# Altium PCB PCB_M2.PcbDoc
Units mil, origin at the board's own origin, x right, y up, seen from the top; angles counter-clockwise.
Board outline 3550 x 2000 mil, 2 copper layers (Top Layer, Bottom Layer); 28 components, 19 nets, 72 pads, 7 vias.
Unrouted connection lines stored in the file: 24.
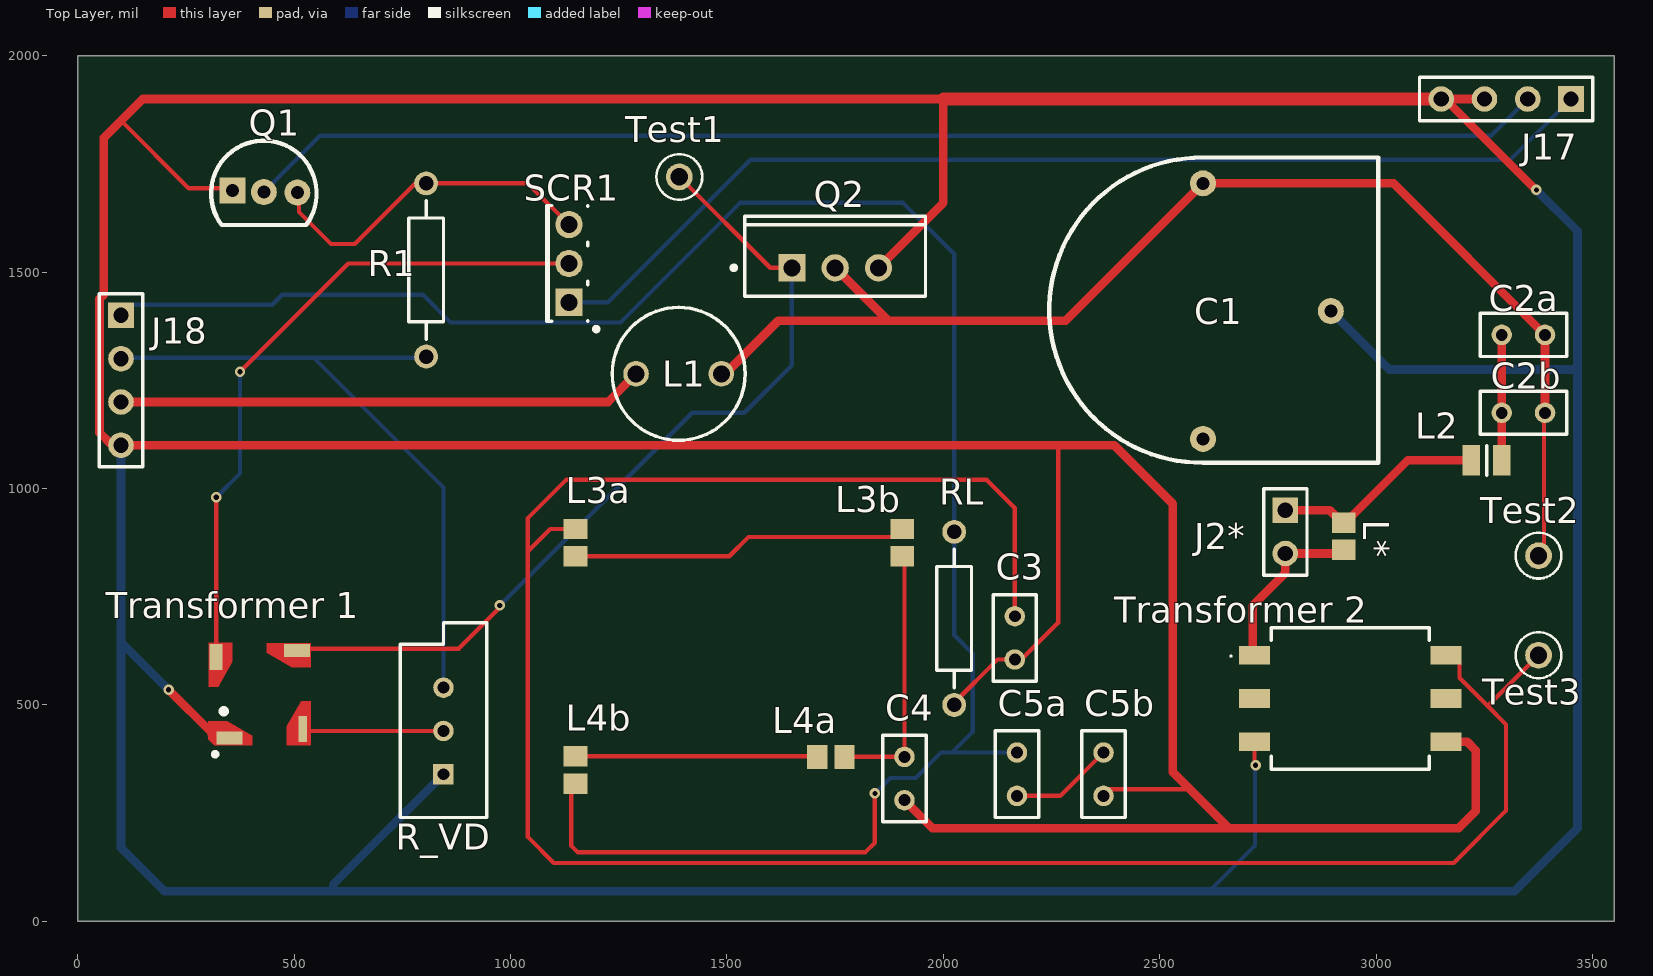
[diagram p0: Top Layer view]
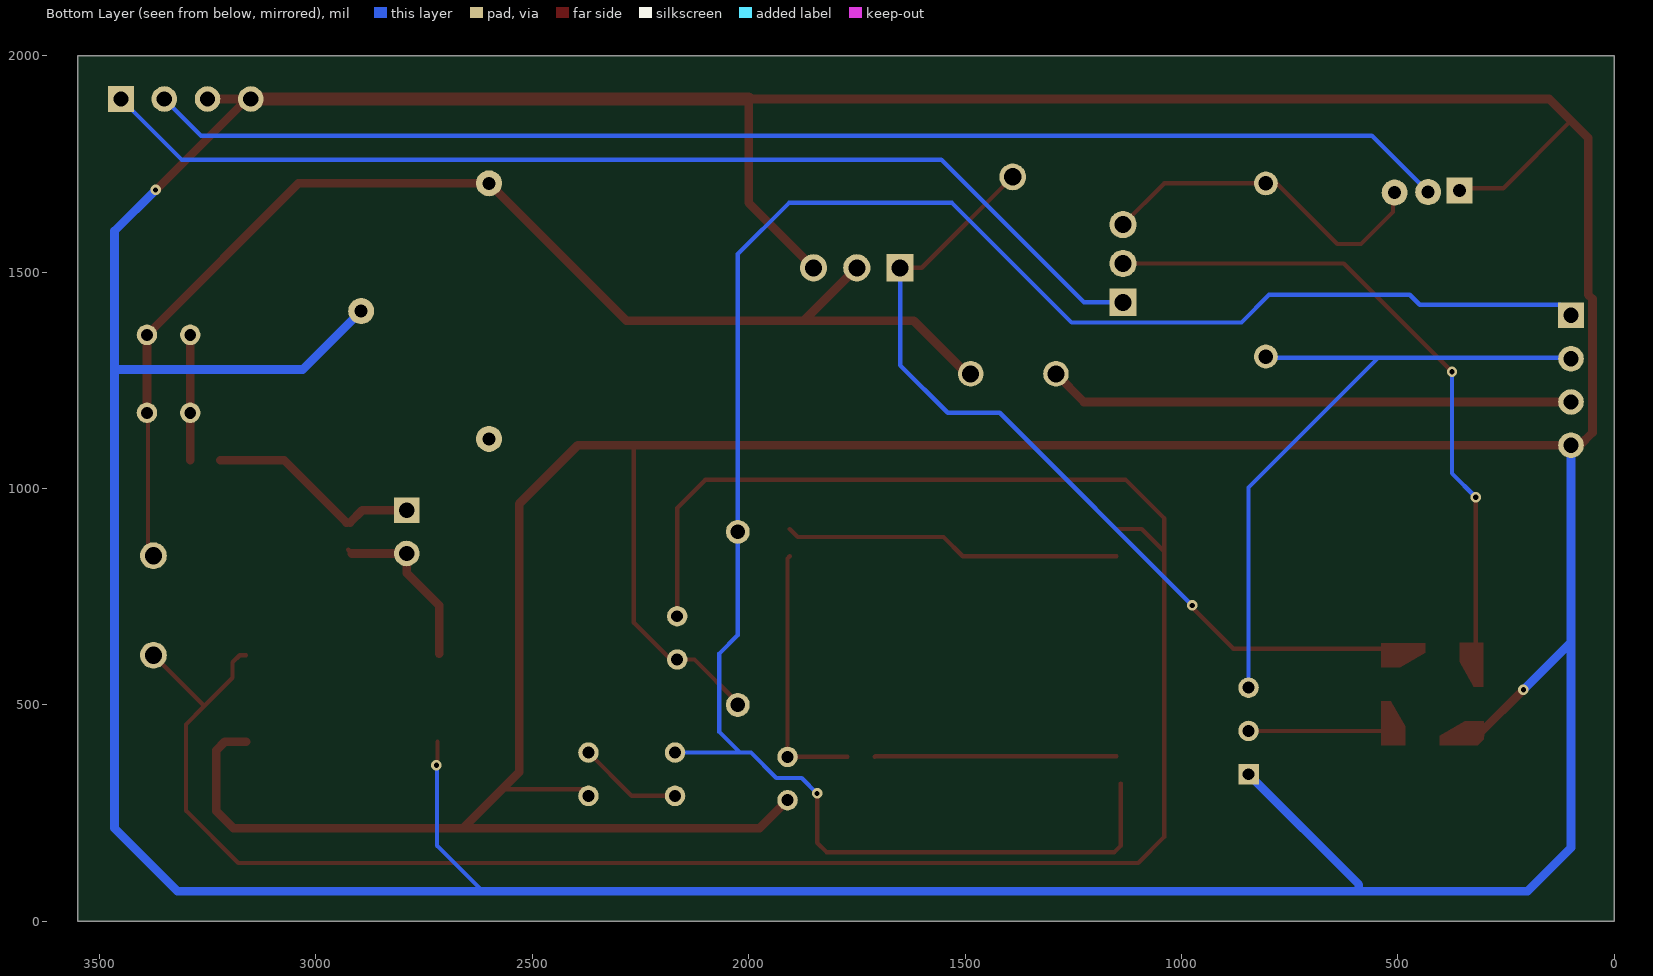
[diagram p1: Bottom Layer view, seen from below]

## Layer stack, top to bottom
Top Solder: solder mask 0.4, Solder Resist, Dk 3.5
Top Layer: signal copper 1.4
Dielectric 1: dielectric 12.6, FR-4, Dk 4.8
Bottom Layer: signal copper 1.4
Bottom Solder: solder mask 0.4, Solder Resist, Dk 3.5

## Board outline
0,0 0,2000 3550,2000 3550,0

## Design rules (kind name [scope] priority, off if disabled: settings)
Clearance [All] p1: gap=10 ignorepadtopadclearanceinfootprint=FALSE except(0: Arc-Hole Track-Hole SMDPad-Hole THPad-Hole Via-Hole Fill-Hole Poly-Hole Region-Hole Text-Hole)
HoleSize [All] p1: absolutevalues=TRUE maxlimit=900 minlimit=12 maxpercent=80.000 minpercent=20.000
MinimumSolderMaskSliver [All] p1: minsoldermaskwidth=1
PolygonConnect [All] p1: connectstyle=Relief reliefconductorwidth=10 reliefentries=4 polygonreliefangle="90 Angle" airgapwidth=10
RoutingVias [All] p1: holewidth=12 width=24 viastyle="Through Hole" minholewidth=12 minwidth=24 maxholewidth=100 maxwidth=200
SilkToSilkClearance [All] p1: silktosilkclearance=0
SilkToSolderMaskClearance [IsPad] p1: minsilkscreentomaskgap=1 clearancetoexposedcopper=TRUE
SolderMaskExpansion [All] p1: expansion=4 istentingtop=FALSE
Width [All] p1: maxlimit=200 minlimit=10 preferedwidth=10
26 further rules are at their usual default settings.

## Components (designator, comment, footprint, x,y, rotation, side; value= is the part's Value field where it differs from the comment)
C1 "Header 3" Potentiometer 2599.72,1114.72 r0 top
C2a "Cap" RAD-0.1 3340,1355 r180 top value=5nF
C2b "Cap" RAD-0.1 3340,1175 r180 top value=1.2nF
C3 "Cap" RAD-0.1 2165,655 r90 top value=150PF
C4 "Cap" RAD-0.1 1910,330 r90 top value=360PF
C5a "Cap" RAD-0.1 2170,340 r90 top value=360PF
C5b "Cap" RAD-0.1 2370,340 r90 top value=430PF
J2* "Header 2" HDR1X2 2790,950 r270 top
J17 "Header 4" HDR1X4 3450,1900 r180 top
J18 "Header 4" HDR1X4 100,1400 r270 top
L1 "768772102" 8095 1388.43,1265 r180 top
L2 "LQW2BANR13G00L" FP-LQW2BAN_00-MFG 3255,1065 r180 top
L3a "Inductor" 2029 1150,875 r270 top value=750nH
L3b "Inductor" 2029 1905,875 r270 top value=180nH
L4a "Inductor" 2029 1740,380 r180 top value=180nH
L4b "Inductor" 2029 1150,350 r270 top value=200nH
L* "Inductor" 2029 2925,890 r90 top value=820nH
Q1 "MOSFET-N" Transistor 432.5,1608.75 r0 top
Q2 "IRF520NPBF" INTR-TO-220AB-3 1750,1510 r90 top
R1 "Res1" AXIAL-0.4 805,1505 r270 top value=1M
R_VD "RPot" VR5 845,440 r90 top value=1K
RL "Res1" AXIAL-0.4 2025,700 r90 top value=50
SCR1 "Triac" 369-03 1135,1520 r90 top
Test1 "5004" FP-5004-MFG 1390,1720 r90 top
Test2 "5004" FP-5004-MFG 3375,845 r90 top
Test3 "5004" FP-5004-MFG 3375,615 r90 top
"Transformer 1" "74488540250" "WE-EHPI 5838" 420,525 r90 top
"Transformer 2" "Comment" 78931812515 2940,515 r0 top

## Footprints (in the part's own frame and the unit in brackets; to place one, negate y for a bottom-side part, rotate by r counter-clockwise, add the part's x,y. Pads: shape width x height; smd on the part's side, far side on the other; paste and mask are expansions set on the pad)
369-03 [mm] "TO, Thru-Hole, Vertical, Heatsink Mounted; 3 In-Line Leads; Pitch 2.28 mm"
  rect 1.6x1.6 hole 1: 1(-2.28,0)
  round 1.6 hole 1: 2(0,0) 3(2.28,0)
  silkscreen extent -3.97,-1.73 3.4,1.3, body extent -3.45,-1.15 3.45,1.35, height 9.7
2029 [mm] "Chip Inductor, Body 2.0x1.2mm, IPC High Density"
  rect 1.2x1.4 smd: 1(-0.8,0) 2(0.8,0)
  body extent -1.1,-0.7 1.1,0.7, height 0.55
8095 [mm] "THT, 2-PIN, Body (7.8 X7.8 mm),pitch 5mm"
  round 1.5 hole 1 paste+0: 1(-2.5,0) 2(2.5,0)
  silkscreen extent -3.9,-3.9 3.9,3.9, body extent -5.52,-5.52 5.52,5.52, height 9.5
78931812515 [mm]
  rect 1.83x1.09 smd: 1(-5.62,2.54) 2(-5.62,0) 3(-5.62,-2.54) 4(5.62,-2.54) 5(5.62,0) 6(5.62,2.54)
  silkscreen extent -7.05,-4.15 4.62,4.15
AXIAL-0.4 [mm] "Axial Device, Thru-Hole; 2 Leads; 0.4 in Pin Spacing"
  round 1.4 hole 0.85: 1(-5.08,0) 2(5.08,0)
  silkscreen extent -4.06,-1.02 4.06,1.02
FP-5004-MFG [mm]
  round 1.57 hole 1.02 paste-1000 mask+0: 1(0,0)
  silkscreen extent -1.34,-1.35 1.34,1.35, body extent -1.45,-1.45 1.45,1.45, height 0.25
FP-LQW2BAN_00-MFG [mm]
  rect 1.02x1.78 smd paste+0 mask+0: 1(-0.89,0) 2(0.89,0)
  silkscreen extent 0,-0.86 0,0.86, body extent -1.5,-0.99 1.5,0.99, height 0.25
HDR1X2 [mm] "Connector; Header; 2 Position"
  rect 1.5x1.5 hole 0.9: 1(0,0)
  round 1.5 hole 0.9: 2(2.54,0)
  silkscreen extent -1.27,-1.27 3.81,1.27
HDR1X4 [mm] "Connector; Header; 4 Position"
  rect 1.5x1.5 hole 0.9: 1(0,0)
  round 1.5 hole 0.9: 2(2.54,0) 3(5.08,0) 4(7.62,0)
  silkscreen extent -1.27,-1.27 8.89,1.27
INTR-TO-220AB-3 [mm] "FM, 3-Leads, Body 10.55x4.7mm, Pitch 2.54mm"
  rect 1.6x1.6 hole 1: 1(0,2.54)
  round 1.6 hole 1: 2(0,0) 3(0,-2.54)
  silkscreen extent -1.67,-5.3 3.03,6.07, body extent -1.67,-5.28 3.03,5.28, height 19.3
Potentiometer [mil]
  round 60 hole 30: 1(0,590.55) 2(295.28,295.28) 3(0,0)
  silkscreen extent -355,-55 405,650
RAD-0.1 [mm] "Radial Cap, Thru-Hole; 2 Leads; 0.1 in Pin Spacing"
  round 1.2 hole 0.7: 1(-1.27,0) 2(1.27,0)
  silkscreen extent -2.54,-1.27 2.54,1.27
Transistor [mil] "TO, 3-Leads, Body Dia 4.7mm, Pitch 1.27mm"
  round 60 hole 30: 1(75,75) 2(-2.5,76.25)
  rect 60x60 hole 30: 3(-75,80)
  silkscreen extent -124,0 119,195
VR5 [mm] "Thru-Hole; 3 Leads"
  rect 1.2x1.2 hole 0.7: 1(-2.54,0)
  round 1.2 hole 0.7: 2(0,0) 3(2.54,0)
  silkscreen extent -5.08,-2.54 6.35,2.54
"WE-EHPI 5838" [mil] "Power Inductor 4-Leads, SMD, Body 6.0 x 6.0mm"
  rect 30x60 smd: 1(-101,69) 3(101,-87)
  rect 30x60 on Top Paste: 1(-101,69) 3(101,-87)
  rect 60x30 smd: 2(86,101)
  rect 60x30 on Top Paste: 2(86,101)
  rect 60x20 smd: 4(-80,-100)
  rect 60x20 on Top Paste: 4(-80,-100)
  Top Layer region: -117.65,-62.88 -74.35,-62.88 -74.35,-118 -117.65,-118
  Top Layer region: -16.1,-95.94 -74.35,-62.88 -74.35,-118 -66,-118 -16.1,-117.94
  Top Layer region: 95.5,-16.75 62.44,-75 117.56,-75 117.56,-66.65 117.5,-16.75
  Top Layer region: 62.44,-118.31 62.44,-75 117.56,-75 117.56,-118.31
  Top Layer region: 16.75,95.5 75,62.44 75,117.56 66.65,117.56 16.75,117.5
  Top Layer region: 118.31,62.44 75,62.44 75,117.56 118.31,117.56
  Top Layer region: -96.08,16.39 -63.02,74.64 -118.14,74.64 -118.14,66.29 -118.08,16.39
  Top Layer region: -118.14,74.64 -118.11,74.66 -118.11,104.33 -104.33,118.11 -62.99,118.11 -62.99,74.66 -63.02,74.64
  silkscreen extent -144,83 -39,107, body extent -118,-118 118,118, height 157

## Part data
C1: "Header, 3-Pin", LatestRevisionDate=17-Jul-2002, LatestRevisionNote="Re-released for DXP Platform.", Publisher="Altium Limited"
C2a C2b C3: library part "CAP ALUM 1.5UF 20% 50V RADIAL", "Ceramic Capacitor, Multilayer, Ceramic, 200V, 10% +Tol, 10% -Tol, X7R, 15% TC, 0.00015uF, Through Hole Mount", Capacitor Type=Ceramic, Case/Package=1510, Manufacturer=KEMET, Manufacturer Part Number=EEA-GA1H1R5H, Max Operating Temperature=125°C, Min Operating Temperature=-55°C, Package Shape=Rectangular, Package Style=RadialMeter, Rated DC Voltage (URdc)=200V, Supplier Part Number=C317C151K2R5TA, Temperature Characteristics Code=X7R, Tolerance  (fill in as +-)=10%, Voltage Rating=50V, Category="Ceramic Capacitors", ComponentLink1Description=https://datasheet.ciiva.com:443/pdfs/VipMasterIC/IC/KEME/KEME-S-A0009782347/KEME-S-A0009782347-1.pdf?src-supplier=IHS+Markit, ComponentLink1URL=https://datasheet.ciiva.com:443/pdfs/VipMasterIC/IC/KEME/KEME-S-A0009782347/KEME-S-A0009782347-1.pdf?src-supplier=IHS+Markit, ComponentLink2Description=https://datasheet.ciiva.com/5388/f3101-goldmax-5388710.pdf?src-supplier=Mouser, ComponentLink2URL=https://datasheet.ciiva.com/5388/f3101-goldmax-5388710.pdf?src-supplier=Mouser, Dielectric Material=Ceramic, Height=5.84mm, JESD-609 Code=e3, LatestRevisionDate=17-Jul-2002, LatestRevisionNote="Re-released for DXP Platform.", Length=3.81mm, Mounting Technology="Through Hole", Multilayer=Yes, Packaging=Bulk, Pins=2, Pricing="1=0.08040, 500=0.06280 (USD)", Published=8-Jun-2000, Publisher="Altium Limited", Reach SVHC Compliant=Yes, RoHS=Yes, RoHS Compliant=Yes, Stock=1515, Supplier="Arrow Electronics", Terminal Finish=Nickel, Terminal Pitch=5.08mm, Termination=Wire, Tolerance (fill in as +-)=10%, Width=2.54mm
C4 C5a C5b: library part "CAP CER 330PF 50V X7R RADIAL", "Capacitor", Manufacturer Part Number=K331K15X7RF53L2, Voltage Rating=50V, LatestRevisionDate=17-Jul-2002, LatestRevisionNote="Re-released for DXP Platform.", Published=8-Jun-2000, Publisher="Altium Limited"
J2*: "Header, 2-Pin", LatestRevisionDate=17-Jul-2002, LatestRevisionNote="Re-released for DXP Platform.", Publisher="Altium Limited"
J17 J18: "Header, 4-Pin", LatestRevisionDate=17-Jul-2002, LatestRevisionNote="Re-released for DXP Platform.", Publisher="Altium Limited"
L1: library part CMP-1388-00007-1, "SMD-Radial Leaded Wire Wound  Inductor WE-TI HV, L=1000 µH", Inductance="1000 ÂµH", Manufacturer="Wuerth Elektronik", ComponentLink1Description="Manufacturer URL", ComponentLink1URL=http://www.we-online.com, ComponentLink2Description=Datasheet, ComponentLink2URL=http://www.we-online.de/katalog/media/pdf/768772102.pdf, PackageReference=8095, PartNumber=768772102
L2: library part CMP-06042-013144-1, "Wire Wound RF Inductor 130nH ±2% 950mA 0.42Ω 0805 (2015)", Case/Package=Nonstandard, Current Rating=950mA, DC Resistance (DCR)=420mR, Inductance=130nH, Max Operating Temperature=125°C, Min Operating Temperature=-55°C, Resistor Type=Wirewound, Self Resonant Frequency=1GHz, Test Frequency=150MHz, Tolerance=2%, Height - Seated (Max)=0.06inch, Length=0.082inch, Mount="Surface Mount", Packaging="Tape and Reel", Shielding=Unshielded, Width=0.06inch
Q1: "N-Channel MOSFET", LatestRevisionDate=17-Jul-2002, LatestRevisionNote="Re-released for DXP Platform.", PackageDescription="TO, Flat Index; 3 In-Line, Axial Leads; Body Dia. 4.6mm; Lead Dia. 0.5 mm (max)", PackageReference=E3, PackageVersion=1995/1996, Published=8-Jun-2000, Publisher="Altium Limited"
Q2: library part CMP-2100-03647-1, "HEXFET(R) Power MOSFET, 100 V, 9.7 A, 0.2 Ohm, -55 to 175 degC, 3-Pin FM (TO-220AB), RoHS, Tube", Case/Package=TO-220AB, Continuous Drain Current (ID)=9.7A, Drain to Source Breakdown Voltage=100V, Drain to Source Resistance=200mOhm, Gate to Source Voltage (Vgs)=20V, Input Capacitance=330pF, Manufacturer="International Rectifier", Max Operating Temperature=175degC, Max Power Dissipation=48W, Min Operating Temperature=-55degC, Package Description="3-Pin Flange Mount, Body 4.445 x 10.415 mm, Pitch 2.54 mm", Package Quantity=50, Current Rating=9.7A, Datasheet URL=http://www.infineon.com/dgdl/irf520npbf.pdf?fileId=5546d462533600a4015355e340711985, Datasheet Version=37926.0, Drain to Source Voltage (Vdss)=100V, Element Configuration=Single, Fall Time=23ns, Height=15.24mm, Lead Free=LeadFree, Lead Pitch=2.54mm, Length=10.54mm, Manufacturer URL=http://internationalrectifier.com/, Mount=ThroughHole, Number of Elements=1, Number of Pins=3, Package Reference=TO-220AB, Packaging=Rail/Tube, Power Dissipation=48W, Radiation Hardening=No, Rds On Max=200mOhm, REACH SVHC=NoSVHC, Rise Time=23ns, RoHSCompliant=true, Turn-Off Delay Time=32ns, Turn-On Delay Time=4.5ns, Voltage Rating (DC)=100V, Width=4.69mm
R1 RL: library part "RES 150 OHM 5% 1/4W AXIAL", "Resistor", Manufacturer Part Number=CFR-25JB-52-150R, Power Rating=1/4W, Tolerance=0.05, LatestRevisionDate=17-Jul-2002, LatestRevisionNote="Re-released for DXP Platform.", Published=8-Jun-2000, Publisher="Altium Limited"
R_VD: "Potentiometer", LatestRevisionDate=17-Jul-2002, LatestRevisionNote="Re-released for DXP Platform.", PackageDescription="Variable Resistor, Thru-Hole; 3 Leads", PackageReference=VR5, Published=8-Jun-2000, Publisher="Altium Limited", Set Position=0.5, Sim Note="Enter the Resistance value and the set point into parameter fields."
SCR1: "Silicon Bidirectional Triode Thyristor", Supplier Part Number 1=497-10407-5-ND, ComponentLink1Description="Manufacturer Link", ComponentLink1URL=http://www.motorola.com/, DatasheetVersion=1999, LatestRevisionDate=17-Jul-2002, LatestRevisionNote="Re-released for DXP Platform.", Note="Pin 2 is electrically connected to Pin 4 (TAB)", PackageDescription="TO, Thru-Hole, Vertical, Heatsink Mounted; 3 In-Line Leads; Pitch 2.28 mm", PackageReference=369-03, Published=29-Sep-2000, Publisher="Altium Limited", Supplier 1=Digi-Key
Test1 Test2 Test3: library part CMP-2000-05575-2, "PC TEST POINT MINIATURE YELLOW", Manufacturer=Keystone, Automotive=No, Category=Conn, ComponentLink2Description=Datasheet, ComponentLink2URL=https://www.keyelco.com/product-pdf.cfm?p=1313, Contact Material=Silver, Device Class L1=Connectors, Device Class L2=unset, Device Class L3=unset, Digikey Description="PC TEST POINT MINIATURE YELLOW", Height=4.72mm, Is Female=yes, Lead Free=Yes, Manufacturer Part Number=5004, Mouser Description="TEST POINT PC MINI .040\"D YELLOW", Number Of Contacts=1, Octopart=https://octopart.com/5004-keystone-28591, Package=5004, RoHS=TRUE
"Transformer 1": library part CMP-1384-00003-1, "Energy Harvesting Coupled Inductor,SMD, WE-EHPI, L=25.0 µH", Inductance="25.0 ÂµH", Manufacturer="Wuerth Elektronik", ComponentLink1Description="Manufacturer URL", ComponentLink1URL=http://www.we-online.com, ComponentLink2Description=Datasheet, ComponentLink2URL=http://katalog.we-online.de/pbs/datasheet/74488540250.pdf, PackageReference="WE-EHPI 5838", PartNumber=74488540250
"Transformer 2": library part 78931812515, "WE-PSPA Push Pull & Gate Drive Transformer NEW", Manufacturer_Name="Wurth Elektronik", Datasheet Link=https://www.we-online.com/components/products/datasheet/78931812515.pdf, Geometry.Height=4.1mm, Manufacturer_Part_Number=78931812515
L3a L3b L4a L4b L*: Code_IEC=1005, Code_JEITA=0402, LatestRevisionDate=29-May-2009, LatestRevisionNote="IPC-7351 Footprint Added.", PackageDescription="Chip Inductor", PackageReference=0402-A, Published=8-Jun-2000, Publisher="Altium Limited"

## Via types
v1: diameter 24, hole 12, Top Layer to Bottom Layer, 7 vias

## Nets (pads, with @x,y where several pads share a name; then routed paths per layer and width w, separated by ;. In a path a pad name is that pad's centre, name@x,y a point inside that pad or via, vN(x,y) a via of type N, cw(c..) or ccw(c..) an arc to the next point about the centre after c; other vN are vias at no path point)
GND: "Transformer 1.1"@351,424 "Transformer 2.3" "Transformer 2.4" C1.2 C3.1 C4.1 C5b.1 J17.3 J17.4 J18.4 Q1.3 Q2.3 R_VD.1 RL.1 | length 18453.5
  Top Layer w10: J18.4@80,1100 J18.4 ; 100,1850 256.25,1693.75 352.5,1693.75 Q1.3 ; RL.1@2025,505 2125,605 C3.1 2180,605 2265,690 2265,1095 ; C5b.1 2385,305 2570,305 ; 2718.74,415 2718.74,363.14 v1(2721.32,360.56)
  Top Layer w20: J18.4@80,1100 50.47,1129.53 50.47,1437.81 60,1447.34 60,1810 100,1850 150,1900 2000,1900 2000,1660 Q2.3 ; J18.4 2395,1100 2530,965 2530,345 2570,305 2660,215 ; v1(210,535) 310,435 310,430 ; C4.1 1975,215 2660,215 ; J17.4 J17.4@3158.92,1900 ; 3161.26,415 3210,415 3230,395 3230,255 3190,215 2660,215 ; J17.3 J17.4@3158.92,1900 ; v1(3370,1690) 3368.92,1690 J17.4@3158.92,1900
  Top Layer w30: 2000,1900 J17.4
  Bottom Layer w10: 100,565 103.48,565 ; 2615,70 2720,175 v1@2720,360.56
  Bottom Layer w20: J18.4 100,645 ; v1(210,535) 100,645 ; R_VD.1 590,85 590,70 ; C1.2 3030,1275 3465,1275 ; v1(3370,1690) 3465,1595 3465,1275 ; 100,645 100,565 100,170 200,70 590,70 ; 590,70 2615,70 3320,70 3465,215 3465,1275
NetC1_1: C1.1 C2a.1 C2b.1 L1.1 Q2.2 Test2.1 | length 2905
  Top Layer w10: L1.1 L1.1@1495.93,1265 ; Q2.2@1740.93,1510 Q2.2 ; 1872.5,1387.5 1875,1387.5 ; Test2.1@3385,865 3387.5,867.5 3387.5,1172.5 C2b.1
  Top Layer w20: L1.1@1495.93,1265 1618.43,1387.5 1872.5,1387.5 Q2.2 ; 1875,1387.5 2281.95,1387.5 C1.1 3039.72,1705.28 C2a.1 C2b.1
NetC2a_2: C2a.2 C2b.2 L2.1 | length 290
  Top Layer w10: L2.1 L2.1
  Top Layer w20: L2.1 C2b.2 C2a.2
NetC3_2: "Transformer 2.6" C3.2 L3a.1 Test3.1 | length 5233.5
  Top Layer w10: L3a.1 1091.5,906.5 1040,855 ; C3.2 2165,955 2100,1020 1130,1020 1129.14,1020.86 1040,931.72 1040,855 ; 3161.26,615 3175.83,615 3192.28,598.54 3192.28,562.67 3257.48,497.48 ; Test3.1 3257.48,497.48 ; 1040,855 1040,195 1100,135 3179.14,135 3300,255.86 3300,454.95 3257.48,497.48
NetC4_2: C4.2 L3b.2 L4a.1 | length 604.1
  Top Layer w10: L4a.1 C4.2 1910,838.5 L3b.2
NetC5a_1: C5a.1 C5b.2 | length 241.4
  Top Layer w10: C5a.1 2270,290 C5b.2
NetC5a_2: C5a.2 J18.1 L4b.2 RL.2 | length 4666.5
  Top Layer w10: L4b.2@1140,318.5 1140,175 1155,160 1820,160 1841.74,181.74 v1(1841.74,295.71) v1@1840.91,294.88
  Bottom Layer w10: J18.1 124.53,1424.53 449.56,1424.53 472.59,1447.56 797.63,1447.56 861.45,1383.74 1253.74,1383.74 1530,1660 1906.72,1660 2025,1541.72 RL.2 2025,661.36 2067.56,618.8 2067.56,437.56 2020,390 ; v1(1841.74,295.71) 1877.41,331.38 1936,331.38 1994.62,390 2020,390 ; C5a.2 2020,390
NetJ2*_1: J2*.1 L2.2 L*.2 | length 501.2
  Top Layer w10: L*.2@2921.06,921.5 L*.2 L*.2@2928.94,921.5
  Top Layer w20: J2*.1 2892.56,950 L*.2@2921.06,921.5 ; L*.2@2928.94,921.5 3072.44,1065 L2.2
NetJ2*_2: "Transformer 2.1" J2*.2 L*.1 | length 406.1
  Top Layer w10: 2715,618.74 2718.74,615 ; L*.1@2916.5,850 L*.1
  Top Layer w20: 2715,618.74 2715,730 2790,805 J2*.2 L*.1@2916.5,850
NetJ17_1: J17.1 SCR1.1 | length 2509.6
  Bottom Layer w10: SCR1.1 1225.24,1430.24 1555,1760 3310,1760 J17.1
NetJ17_2: J17.2 Q1.2 | length 3009.1
  Bottom Layer w10: Q1.2 560,1815 3265,1815 J17.2
NetJ18_2: J18.2 R1.2 R_VD.3 | length 1595.9
  Top Layer w10: R1.2@800,1300 R1.2
  Bottom Layer w10: J18.2 102.5,1302.5 545,1302.5 ; R1.2@800,1305 797.5,1302.5 545,1302.5 ; R_VD.3 845,1002.5 545,1302.5
NetJ18_3: J18.3 L1.2 | length 1216.9
  Top Layer w20: J18.3 1225,1200 L1.2
NetL3a_2: L3a.2 L3b.1 | length 781.1
  Top Layer w10: L3a.2 1505.32,843.5 1549.69,887.87 1886.38,887.87 L3b.1
NetL4a_2: L4a.2 L4b.1 | length 559.1
  Top Layer w10: L4b.1 1707.01,381.5 L4a.2
NetQ1_1: Q1.1 R1.1 SCR1.3 | length 798.3
  Top Layer w10: Q1.1 511.25,1680 511.25,1638.75 585,1565 640,1565 780,1705 890,1705 1039.76,1705 SCR1.3
NetQ2_1: "Transformer 1.3"@507,626 Q2.1 Test1.1 | length 1990.9
  Top Layer w10: 507,626 511,630 880,630 975,725 v1(975,730) ; Test1.1 1600,1510 Q2.1
  Bottom Layer w10: v1(975,730) 1420,1175 1540,1175 1650,1285 Q2.1
NetR_VD_3: "Transformer 1.4"@520,445 R_VD.2 | length 327.1
  Top Layer w10: 520,445 525,440 R_VD.2
NetSCR1_2: "Transformer 1.2"@319,611 SCR1.2 | length 1545.7
  Top Layer w10: 319,611 320,612 v1(320,980) ; v1(375,1270) 625,1520 SCR1.2
  Bottom Layer w10: v1(320,980) 375,1035 v1(375,1270)
pads on no net: "Transformer 1.1"@351,424 "Transformer 1.2"@319,611 "Transformer 1.3"@507,626 "Transformer 1.4"@520,445 "Transformer 2.2" "Transformer 2.5" C1.3

## Silkscreen, mask and mechanical layers (free items; w line width, h text height)
Mechanical 6:
  the board outline again, w10

## Dimensions
100,1400 to 0,2000 on Dimension
3450,1900 to 3550,2000 on Dimension
100,1100 to 0,0 on Dimension
100,1100 to 0,0 on Top Component Center